# Altium PCB goodfet22a.PcbDoc
Units mil, origin at the board's own origin, x right, y up, seen from the top; angles counter-clockwise.
Board outline 2550 x 2200 mil, 2 copper layers (Top Layer, Bottom Layer); 36 components, 89 nets, 267 pads, 52 vias.
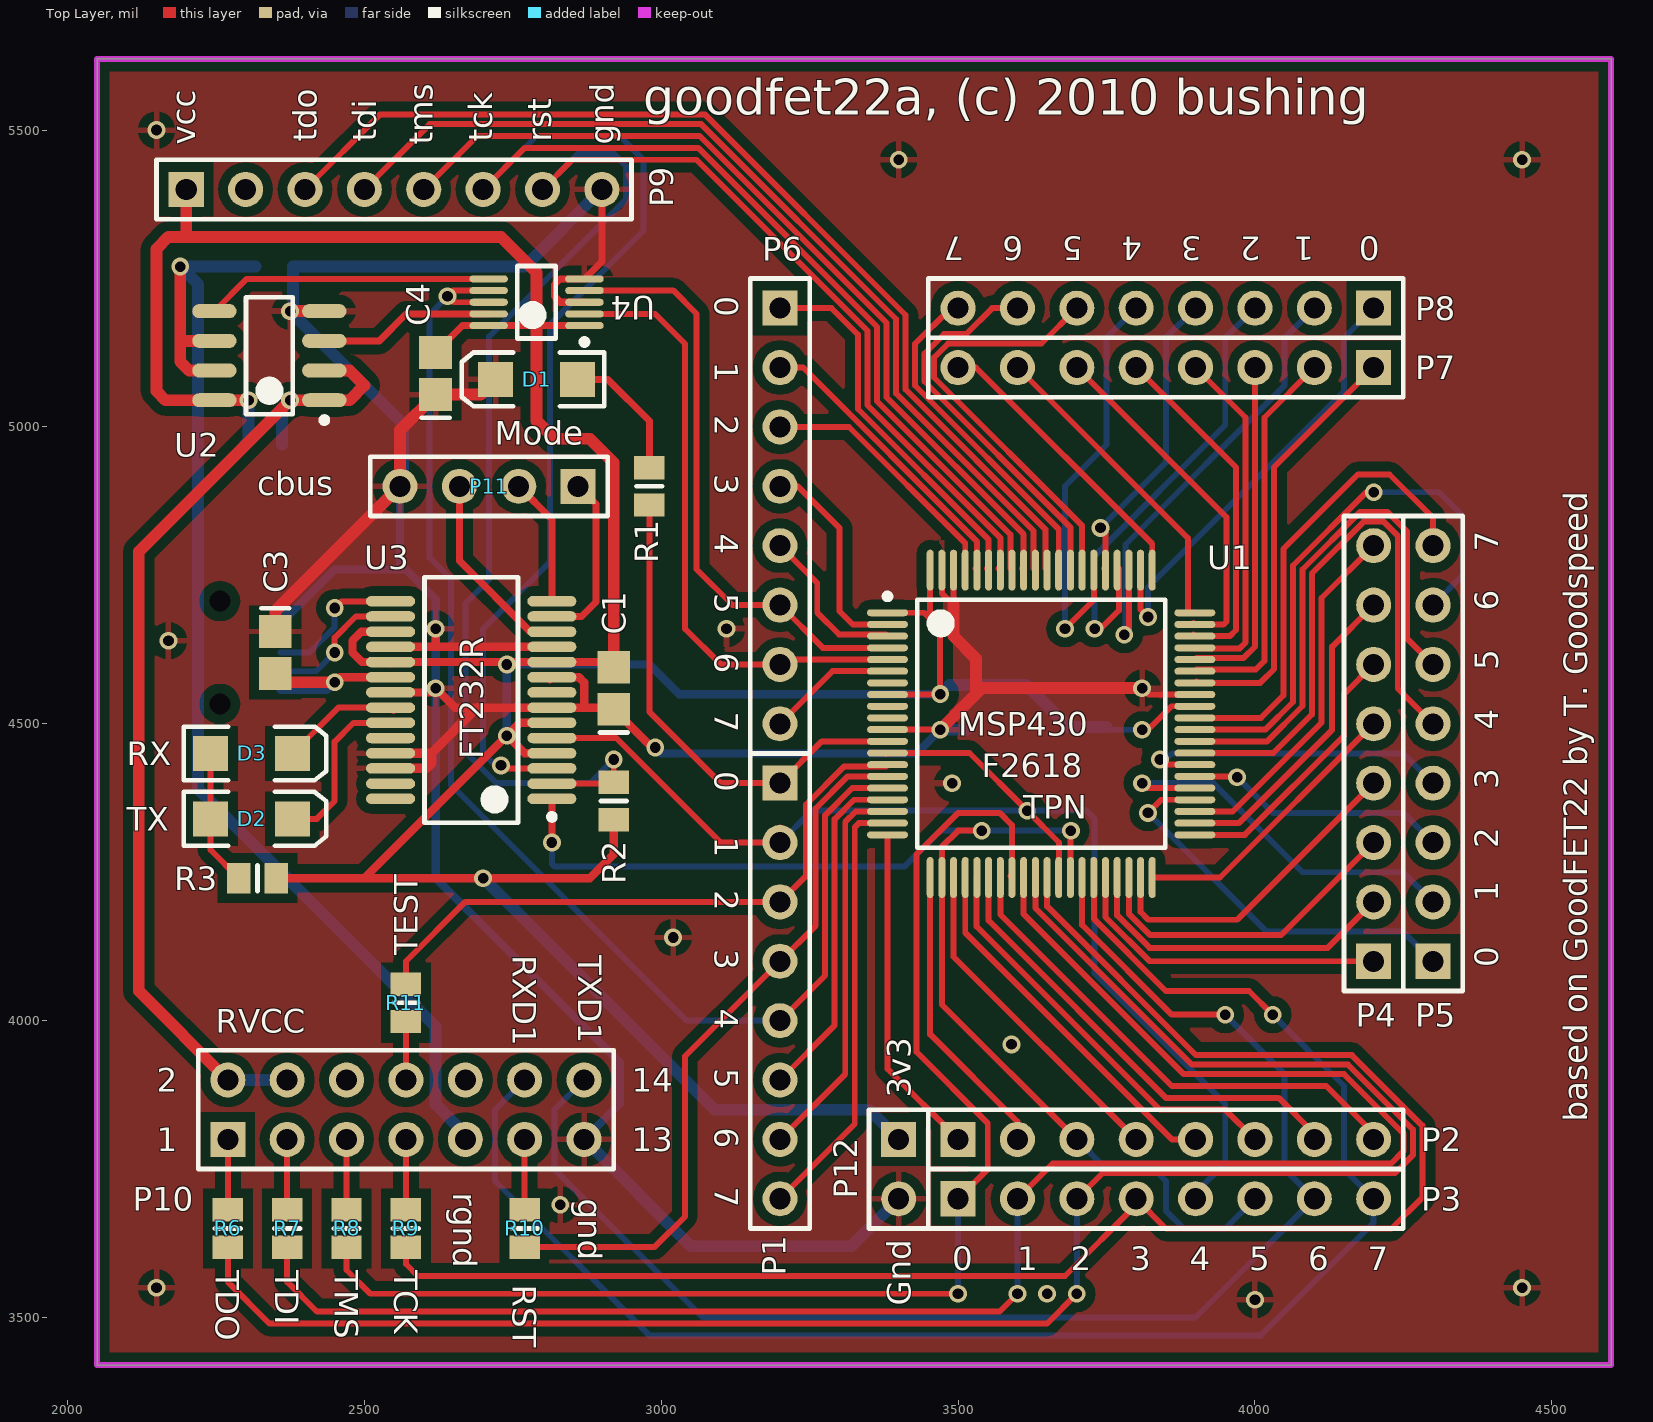
[diagram p0: Top Layer view]
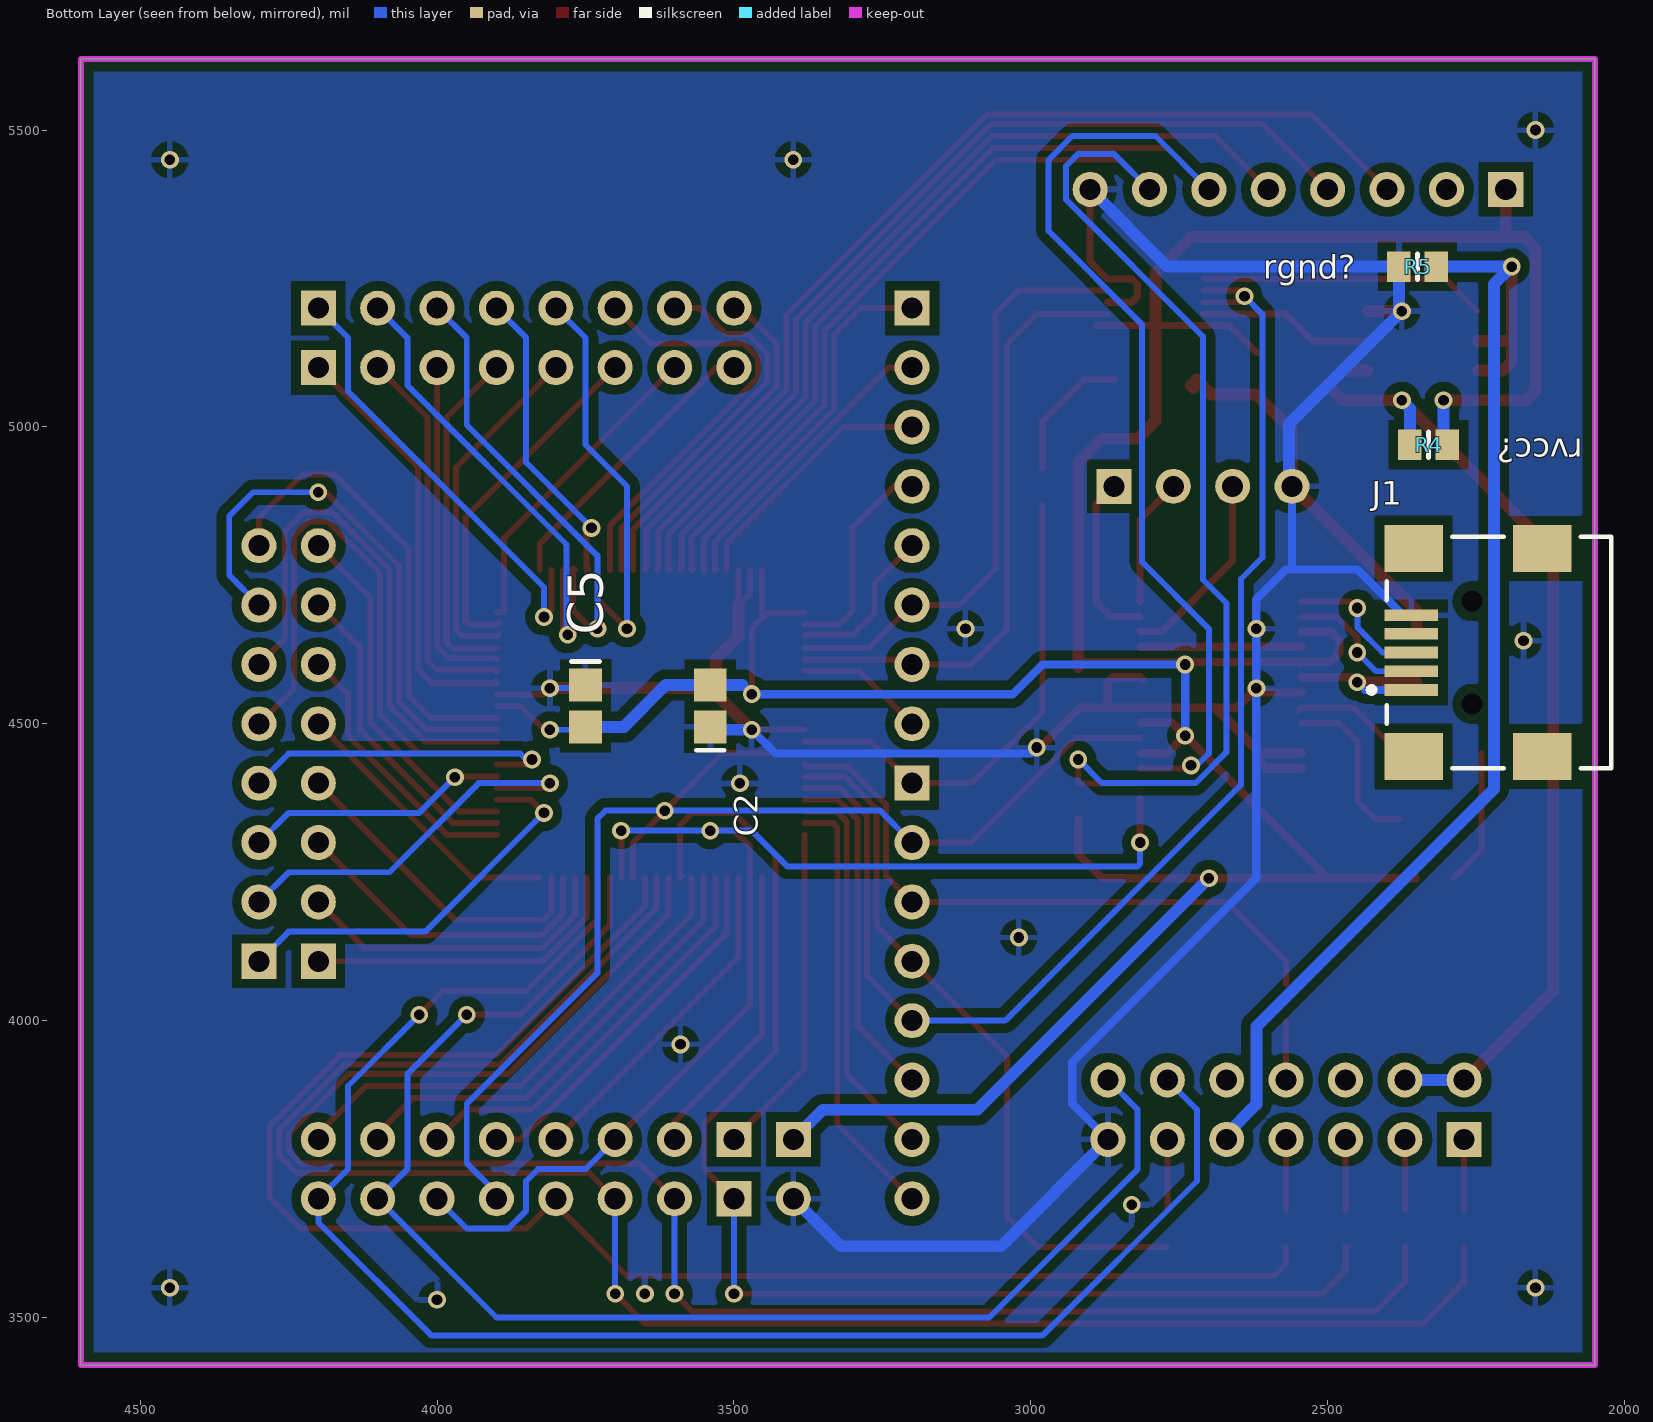
[diagram p1: Bottom Layer view, seen from below]

## Layer stack, top to bottom
Top Layer: signal copper 1.4
Dielectric: dielectric 12.6, FR-4, Dk 4.8
Bottom Layer: signal copper 1.4

## Board outline
2050,3420 4600,3420 4600,5620 2050,5620

## Design rules (kind name [scope] priority, off if disabled: settings)
Clearance Clearance_1 [InNamedPolygon('Bottom Layer-Gnd') Or  InNamedPolygon('Top Layer-Gnd')] p1: gap=16
Clearance [All] p2: gap=6
ComponentClearance [All] p1 off: gap=10 collisioncheckmode=3 verticalgap=10 showdistances=FALSE
DiffPairsRouting [All] p1: maxlimit=10 minlimit=10 mostfreqgap=10 maxuncoupledlength=500
MinimumSolderMaskSliver [All] p1: minsoldermaskwidth=5
PolygonConnect [All] p1: connectstyle=Relief reliefconductorwidth=10 reliefentries=4 polygonreliefangle="90 Angle"
RoutingVias [All] p1: holewidth=18 width=30 viastyle="Through Hole" minholewidth=18 minwidth=30 maxholewidth=28 maxwidth=50
SilkscreenOverComponentPads [All] p1: minsilkscreentomaskgap=6
SolderMaskExpansion [All] p1: expansion=4
Width Width_1 [(InNet('GND') OR InNet('RGND') OR InNet('RVCC') OR InNet('VCC') OR InNet('VCC5'))] p1: maxlimit=20 minlimit=10 preferedwidth=20
Width [All] p2: maxlimit=12 minlimit=6 preferedwidth=10
24 further rules are at their usual default settings.

## Classes and differential pairs
differential pair USBD: +USBD_P -USBD_N

## Components (designator, comment, footprint, x,y, rotation, side; value= is the part's Value field where it differs from the comment)
C1 "Cap Semi" CAPC2512L 2920,4560 r90 top
C2 "Cap Semi" CAPC2512L 3540,4530 r90 bottom
C3 "Cap Semi" CAPC2512L 2350,4620 r270 top
C4 "Cap Semi" CAPC2512L 2620,5090 r90 top
C5 "Cap Semi" CAPC2512L 3750,4530 r270 bottom
D1 "Mode" DSO-F2/D6.1 2790,5080 r180 top
D2 "TXLED" DSO-F2/D6.1 2310,4340 r0 top
D3 "RXLED" DSO-F2/D6.1 2310,4450 r0 top
J1 "USB-Btype" 440479 2050,4620 r180 bottom
P1 "Header 8" HDR1X8 3200,4400 r270 top
P2 "Header 8" HDR1X8 3500,3800 r0 top
P3 "Header 8" HDR1X8 3500,3700 r0 top
P4 "Header 8" HDR1X8 4200,4100 r90 top
P5 "Header 8" HDR1X8 4300,4100 r90 top
P6 "Header 8" HDR1X8 3200,5200 r270 top
P7 "Header 8" HDR1X8 4200,5100 r180 top
P8 "Header 8" HDR1X8 4200,5200 r180 top
P9 "Header 8" HDR1X8 2200,5400 r0 top
P10 "Header 7X2" HDR2X7 2270,3800 r0 top
P11 "Header 4" HDR1X4 2860,4900 r180 top
P12 "Header 2" HDR1X2 3400,3800 r270 top
R1 "Res Semi" RESC2012L 2980,4900 r90 top
R2 "Res Semi" RESC2012L 2920,4370 r270 top
R3 "Res Semi" RESC2012L 2320,4240 r0 top
R4 "Res Semi" RESC2012L 2330,4970 r180 bottom
R5 "Res Semi" RESC2012L 2348.5,5270 r180 bottom
R6 "Res Semi" RESC2012L 2270,3650 r270 top
R7 "Res Semi" RESC2012L 2370,3650 r270 top
R8 "Res Semi" RESC2012L 2470,3650 r270 top
R9 "Res Semi" RESC2012L 2570,3650 r270 top
R10 "Res Semi" RESC2012L 2770,3650 r270 top
R11 "Res Semi" RESC2012L 2570,4030 r270 top
U1 "MSP430F2618TPN" TSQFP50P1400X1400X160-80N 3640,4500 r0 top
U2 "TL072D" D008_L 2340,5120 r180 top
U3 "FT232RL" SOP65P780X200-28N 2680,4540 r180 top
U4 "TS5A23157" TSSOP50P490X110-10N 2790,5210 r180 top

## Footprints (in the part's own frame and the unit in brackets; to place one, negate y for a bottom-side part, rotate by r counter-clockwise, add the part's x,y. Pads: shape width x height; smd on the part's side, far side on the other; paste and mask are expansions set on the pad)
440479 [mm] "Connector; USB2.0, Type AB, SM; 5 Position; Right Angle"
  rect 2.3x0.5 smd: 1(-7.85,-1.6) 2(-7.85,-0.8) 3(-7.85,0) 4(-7.85,0.8) 5(-7.85,1.6)
  rect 2.5x2 smd: 6(-7.75,4.45) 7(-2.25,4.45) 8(-7.75,-4.45) 9(-2.25,-4.45)
  round 0.6 hole 0.9 unplated: MH1(-5.25,2.2) MH2(-5.25,-2.2)
  silkscreen extent -9.68,-4.95 0.7,4.95
CAPC2512L [mm] "Chip Capacitor, Body 2.54x1.27mm, IPC High Density"
  rect 1.4x1.4 smd: 1(-0.9,0) 2(0.9,0)
  silkscreen extent -1.9,-0.6 -1.9,0.6, body extent -1.45,-0.82 1.45,0.82, height 1.3
D008_L [mm] "SOIC, 8-Leads, Body 4.9x3.9mm, Pitch 1.27mm, IPC High Density"
  oval 1.9x0.6 smd: 1(-2.35,1.905) 2(-2.35,0.635) 3(-2.35,-0.635) 4(-2.35,-1.905) 5(2.35,-1.905) 6(2.35,-0.635) 7(2.35,0.635) 8(2.35,1.905)
  silkscreen extent -2.48,-2.5 1,2.88, body extent -2,-2.5 2,2.5, height 1.75
DSO-F2/D6.1 [mm] "SMT LED; 2 Flat Leads"
  rect 1.5x1.5 smd: 1(-1.75,0) 2(1.75,0)
  silkscreen extent -2.9,-1.15 3.2,1.15
HDR1X2 [mm] "Connector; Header; 2 Position"
  rect 1.5x1.5 hole 0.9: 1(0,0)
  round 1.5 hole 0.9: 2(2.54,0)
  silkscreen extent -1.27,-1.27 3.81,1.27
HDR1X4 [mm] "Connector; Header; 4 Position"
  rect 1.5x1.5 hole 0.9: 1(0,0)
  round 1.5 hole 0.9: 2(2.54,0) 3(5.08,0) 4(7.62,0)
  silkscreen extent -1.27,-1.27 8.89,1.27
HDR1X8 [mm] "Connector; Header; 8 Position"
  rect 1.5x1.5 hole 0.9: 1(0,0)
  round 1.5 hole 0.9: 2(2.54,0) 3(5.08,0) 4(7.62,0) 5(10.16,0) 6(12.7,0) 7(15.24,0) 8(17.78,0)
  silkscreen extent -1.27,-1.27 19.05,1.27
HDR2X7 [mm] "Connector; Header; 7x2 Position"
  rect 1.5x1.5 hole 0.9: 1(0,0)
  round 1.5 hole 0.9: 2(0,2.54) 3(2.54,0) 4(2.54,2.54) 5(5.08,0) 6(5.08,2.54) 7(7.62,0) 8(7.62,2.54) 9(10.16,0) 10(10.16,2.54) 11(12.7,0) 12(12.7,2.54) 13(15.24,0) 14(15.24,2.54)
  silkscreen extent -1.27,-1.27 16.51,3.81
RESC2012L [mm] "Chip Resistor, Body 2.0x1.3mm, IPC High Density"
  rect 1x1.3 smd: 1(-0.8,0) 2(0.8,0)
  silkscreen extent 0,-0.55 0,0.55, body extent -1.07,-0.7 1.07,0.7, height 2.54
SOP65P780X200-28N [mm] "SOP, 28-Leads, Body 10.5x5.6mm (max), Pitch 0.65mm, IPC Medium Density"
  oval 2.1x0.45 smd: 1(-3.45,4.225) 2(-3.45,3.575) 3(-3.45,2.925) 4(-3.45,2.275) 5(-3.45,1.625) 6(-3.45,0.975) 7(-3.45,0.325) 8(-3.45,-0.325) 9(-3.45,-0.975) 10(-3.45,-1.625) 11(-3.45,-2.275) 12(-3.45,-2.925) 13(-3.45,-3.575) 14(-3.45,-4.225) 15(3.45,-4.225) 16(3.45,-3.575) 17(3.45,-2.925) 18(3.45,-2.275) 19(3.45,-1.625) 20(3.45,-0.975) 21(3.45,-0.325) 22(3.45,0.325) 23(3.45,0.975) 24(3.45,1.625) 25(3.45,2.275) 26(3.45,2.925) 27(3.45,3.575) 28(3.45,4.225)
  silkscreen extent -3.58,-5.25 2,5.25, body extent -2.8,-5.25 2.8,5.25, height 2
TSQFP50P1400X1400X160-80N [mm] "TSQFP, 80-Leads, Body 14.2x14.2mm (max), Pitch 0.50mm, IPC Medium Density"
  oval 1.75x0.3 smd: 1(-6.575,4.75) 2(-6.575,4.25) 3(-6.575,3.75) 4(-6.575,3.25) 5(-6.575,2.75) 6(-6.575,2.25) 7(-6.575,1.75) 8(-6.575,1.25) 9(-6.575,0.75) 10(-6.575,0.25) 11(-6.575,-0.25) 12(-6.575,-0.75) 13(-6.575,-1.25) 14(-6.575,-1.75) 15(-6.575,-2.25) 16(-6.575,-2.75) 17(-6.575,-3.25) 18(-6.575,-3.75) 19(-6.575,-4.25) 20(-6.575,-4.75) 41(6.575,-4.75) 42(6.575,-4.25) 43(6.575,-3.75) 44(6.575,-3.25) 45(6.575,-2.75) 46(6.575,-2.25) 47(6.575,-1.75) 48(6.575,-1.25) 49(6.575,-0.75) 50(6.575,-0.25) 51(6.575,0.25) 52(6.575,0.75) 53(6.575,1.25) 54(6.575,1.75) 55(6.575,2.25) 56(6.575,2.75) 57(6.575,3.25) 58(6.575,3.75) 59(6.575,4.25) 60(6.575,4.75)
  oval 0.3x1.75 smd: 21(-4.75,-6.575) 22(-4.25,-6.575) 23(-3.75,-6.575) 24(-3.25,-6.575) 25(-2.75,-6.575) 26(-2.25,-6.575) 27(-1.75,-6.575) 28(-1.25,-6.575) 29(-0.75,-6.575) 30(-0.25,-6.575) 31(0.25,-6.575) 32(0.75,-6.575) 33(1.25,-6.575) 34(1.75,-6.575) 35(2.25,-6.575) 36(2.75,-6.575) 37(3.25,-6.575) 38(3.75,-6.575) 39(4.25,-6.575) 40(4.75,-6.575) 61(4.75,6.575) 62(4.25,6.575) 63(3.75,6.575) 64(3.25,6.575) 65(2.75,6.575) 66(2.25,6.575) 67(1.75,6.575) 68(1.25,6.575) 69(0.75,6.575) 70(0.25,6.575) 71(-0.25,6.575) 72(-0.75,6.575) 73(-1.25,6.575) 74(-1.75,6.575) 75(-2.25,6.575) 76(-2.75,6.575) 77(-3.25,6.575) 78(-3.75,6.575) 79(-4.25,6.575) 80(-4.75,6.575)
  silkscreen extent -6.7,-5.3 5.3,5.57, body extent -6,-6 6,6, height 1.6
TSSOP50P490X110-10N [mm] "TSSOP, 10-Leads, Body 3.1x3.1mm (max), Pitch 0.50mm, IPC Medium Density"
  oval 1.65x0.3 smd: 1(-2.05,1) 2(-2.05,0.5) 3(-2.05,0) 4(-2.05,-0.5) 5(-2.05,-1) 6(2.05,-1) 7(2.05,-0.5) 8(2.05,0) 9(2.05,0.5) 10(2.05,1)
  silkscreen extent -2.18,-1.55 0.82,1.82, body extent -1.55,-1.55 1.55,1.55, height 1.1

## Part data
C1 C2 C3 C4 C5: "Capacitor (Semiconductor SIM Model)"
D1 D2 D3: library part LED2, "Typical RED, GREEN, YELLOW, AMBER GaAs LED"
J1: "USB B Type Right Angle, SMT 5 Pin"
P1 P2 P3 P4 P5 P6 P7 P8 P9: "Header, 8-Pin"
P10: "Header, 7-Pin, Dual row"
P11: "Header, 4-Pin"
P12: "Header, 2-Pin"
R1 R2 R3 R4 R5 R6 R7 R8 R9 R10 R11: "Semiconductor Resistor"
U2: "Low-Noise JFET-Input Operational Amplifier"
U3: "USB UART Asynchronous Serial Data Transfer Chip, LQFP-32, Pb-Free"

## Via types
v1: diameter 30, hole 18, Top Layer to Bottom Layer, 52 vias

## Nets (pads, with @x,y where several pads share a name; then routed paths per layer and width w, separated by ;. In a path a pad name is that pad's centre, name@x,y a point inside that pad or via, vN(x,y) a via of type N, cw(c..) or ccw(c..) an arc to the next point about the centre after c; other vN are vias at no path point)
DAC0: P6.7 U1.5 U4.2 | length 1036.1
  Top Layer w10: U4.2 2989.69,5190.31 3040,5140 3040,4660 3100,4600 P6.7 ; P6.7@3200,4608.27 U1.5
DAC1: P6.6 U1.4 U4.4 | length 1011.8
  Top Layer w10: U4.4 3019.68,5229.69 3020,5230 3059.47,5190.53 3059.47,4760.53 3120,4700 P6.6 3272.05,4627.95 U1.4
DTR: P9.7 R2.1 U1.74 U3.2 | length 2891
  Top Layer w10: P9.7 2850,5450 3059.49,5450 3347.47,5162.02 3347.47,5036.76 3571.1,4813.13 U1.74 U1.74@3568.32,4761.64 ; U3.2 R2.1@2920,4399.25 ; R2.1 v1(2920,4440)
  Bottom Layer w10: P9.7 2860,5460 2920,5460 2940.53,5439.47 2940.53,5382.69 2710,5152.16 2710,4742.63 2670,4702.63 2670,4452.63 2722.63,4400 2880,4400 v1(2920,4440)
GND: C1.1 C2.1 C3.1 C4.1 C5.1 D1.2 J1.5 P9.8 P10.13 P11.4 P12.2 R5.1 U1.11 U1.53 U1.78 U1.79 U2.4 U3.7 U3.9 U3.11 U3.18 U3.21 U3.25 U3.26 U4.3 U4.5 | length 6794.4
  Top Layer w10: U1.11 3470,4490.16 v1@3470.16,4490.16 ; U1.79 3472.68,4719.69 3492.36,4700 U1.78 ; v1(3810,4560) 3820.79,4549.21 U1.53 U1.53@3866.09,4549.21
  Top Layer w12: U4.3 2830,5210 2820,5220 2820,5240 2829.37,5249.37 U4.5 2900,5278.66 P9.8
  Top Layer w14: U3.21 v1@2617.2,4552.8 ; U3.18 2620,4629.57 ; v1(2620,4560) 2652.8,4527.2 2690,4527.2 U3.7 2917.36,4527.2 C1.1 2984.57,4460 v1(2990,4460) ; v1(2620,4660) 2620,4629.57 ; U3.9@2812.09,4574.65 U3.9 2861.61,4578.39 2870.17,4569.83 2870.17,4535.39 2870,4535.23 ; U3.11 2620,4629.57
  Top Layer w16: U3.26 2604.84,4424.84 2613.23,4433.23 2613.23,4450.43 ; U3.25 2613.23,4450.43 ; 2690,4527.2 2613.23,4450.43
  Top Layer w20: C3.1 2350,4690 P11.4 2560,4994.57 C4.1 2695.67,5054.57 D1.2 ; v1(2375,5195) U2.4 ; D1.2@2725.55,5065.55 D1.2@2730,5070 ; v1@3470.16,4490.16 3530,4550 ; 3492.36,4700 3492.36,4647.64 3530,4610 3530,4550 ; v1(3810,4560) 3540,4560 3530,4550
  Bottom Layer w10: C5.1 3755.43,4560 v1(3810,4560)
  Bottom Layer w14: J1.5 2372.99,4682.99 2450,4760 2560,4760 ; P11.4@2565,4905 P11.4 2560,4760 ; P10.13 2930,3860 2930,3930 2620,4240 v1(2620,4560) v1(2620,4660) 2620,4710 2570,4760 2560,4760 ; v1(2990,4460) 3000,4450 3430,4450 v1(3470,4490)
  Bottom Layer w20: P11.4@2565,4905 2565,5005 v1(2375,5195) 2380,5200 R5.1 2770,5270 P9.8 ; P10.13 3050,3620 3320,3620 P12.2 ; v1(3470,4490) C2.1@3514.57,4490
  other v1: 4000,3530 3650,3540 2150,3550 4450,3550 2830,3690 3590,3960 3020,4140 3490,4400 2170,4640 3110,4660 3400,5450 4450,5450 2150,5500
GSEL: P1.5 U1.16 U4.7 U4.8 | length 2216.9
  Top Layer w10: U4.8 2650,5210 v1(2640,5220) 2649.68,5229.69 U4.7 ; P1.5 3276,4076 3276,4346 3321.73,4391.73 U1.16
  Bottom Layer w10: v1(2640,5220) 2610,5190 2610,4780 2646,4744 2646,4397.23 3043.23,4000 P1.5
MODE: P1.1 R1.1 U1.12 | length 828.5
  Top Layer w10: R1.1 2980,4520 3100,4400 P1.1 3270.47,4470.47 U1.12
NetD1_1: D1.1 R1.2 | length 228.6
  Top Layer w12: D1.1 2910,5080 2980,5010 R1.2
NetD2_1: D2.1 D3.1 R3.1 | length 229.6
  Top Layer w10: D3.1 D2.1 2241.1,4287.4 R3.1
NetD2_2: D2.2 U3.23 | length 290.8
  Top Layer w10: D2.2 2420,4340 2450,4370 2450,4470 2481.61,4501.61 U3.23
NetD3_2: D3.2 U3.22 | length 203.9
  Top Layer w10: D3.2 2456.1,4527.2 U3.22
  Top Layer w12: U3.22 U3.22@2548.91,4522.47
NetP1_6: P1.6 U1.17 | length 580.2
  Top Layer w10: P1.6 3292,3992 3292,4339.37 3324.67,4372.05 U1.17
NetP1_7: P1.7 U1.18 | length 658.7
  Top Layer w10: P1.7 3310,3910 3310,4334.75 3327.62,4352.36 U1.18
NetP1_8: P1.8 U1.19 | length 736.1
  Top Layer w10: P1.8 3326,3826 3326,4326 3332.68,4332.68 U1.19
NetP2_1: P2.1 U1.20 | length 562.2
  Top Layer w10: U1.20 3381.14,3918.86 P2.1
NetP2_2: P2.2 U1.21 | length 502
  Top Layer w10: U1.21 3452.99,3977.01 3600,3830 P2.2
NetP2_4: P2.4 U1.23 | length 568.6
  Top Layer w10: U1.23 3492.36,4107.64 P2.4
NetP2_5: P2.5 U1.24 | length 625.3
  Top Layer w10: U1.24 3512.05,4147.95 3860,3800 P2.5
NetP2_6: P2.6 U1.25 | length 699.9
  Top Layer w10: U1.25 3531.31,4240.72 3531.31,4158.69 3840,3850 3950,3850 P2.6
NetP2_7: P2.7 U1.26 | length 779.7
  Top Layer w10: U1.26 3551.42,4168.58 3850,3870 4040,3870 4100,3810 P2.7
NetP2_8: P2.8 U1.27 | length 853.9
  Top Layer w10: U1.27 3571.1,4178.9 3860,3890 4120,3890 4200,3810 P2.8
NetP4_1: P4.1 U1.36 | length 549.3
  Top Layer w10: U1.36 3748.27,4174.36 3822.63,4100 P4.1
NetP4_2: P4.2 U1.37 | length 550.6
  Top Layer w10: U1.37 3767.95,4177.3 3822.63,4122.63 4122.63,4122.63 P4.2
NetP4_3: P4.3 U1.38 | length 552.9
  Top Layer w10: U1.38 3787.64,4180.24 3823.94,4143.94 4043.94,4143.94 P4.3
NetP4_4: P4.4 U1.39 | length 551.4
  Top Layer w10: U1.39 3807.32,4183.19 3820.51,4170 3970,4170 P4.4
NetP4_5: P4.5 U1.40 | length 480.2
  Top Layer w10: U1.40 3941.14,4241.14 P4.5
NetP4_6: P4.6 U1.41 | length 461
  Top Layer w10: U1.41 3982.99,4312.99 4150,4480 4150,4550 P4.6
NetP4_7: P4.7 U1.42 | length 535.3
  Top Layer w10: U1.42 3972.68,4332.68 4130,4490 4130,4630 P4.7
NetP4_8: P4.8 U1.43 | length 609.6
  Top Layer w10: U1.43 3962.36,4352.36 4112,4502 4112,4712 P4.8
NetP5_1: P5.1 U1.44 | length 671.5
  Top Layer w10: v1(3820,4350) 3842.05,4372.05 U1.44
  Bottom Layer w10: v1(3820,4350) 4020,4150 4250,4150 P5.1
NetP5_2: P5.2 U1.45 | length 665.1
  Top Layer w10: v1(3810,4400) 3818.27,4391.73 U1.45
  Bottom Layer w10: v1(3810,4400) 3930,4400 4080,4250 4250,4250 P5.2
NetP5_3: P5.3 U1.46 | length 449.3
  Top Layer w10: U1.46@3900.28,4410 U1.46 3968.58,4411.42 v1(3970,4410)
  Bottom Layer w10: v1(3970,4410) 4030,4350 4250,4350 P5.3
NetP5_4: P5.4 U1.47 | length 546.8
  Top Layer w10: v1@3841.1,4431.1 U1.47
  Bottom Layer w10: v1@3840,4430 3845,4435 3860,4450 4250,4450 P5.4
  other v1: 3840,4440
NetP5_5: P5.5 U1.48 | length 993.4
  Top Layer w10: U1.48 4030.79,4450.79 4096,4516 4096,4753.31 4183.21,4840.53 4216.79,4840.53 4240.53,4816.79 4240.53,4559.47 P5.5
NetP5_6: P5.6 U1.49 | length 907.4
  Top Layer w10: U1.49 4020.47,4470.47 4080,4530 4080,4759.94 4176.59,4856.53 4223.41,4856.53 4256.53,4823.41 4256.53,4643.47 P5.6
NetP5_7: P5.7 U1.50 | length 933.2
  Top Layer w10: U1.50 4017.53,4490.16 4064,4536.63 4064,4766.57 v1@4187.43,4890
  Bottom Layer w10: v1@4200,4880 v1@4205,4885 ; v1(4200,4890) 4310,4890 4350,4850 4350,4750 P5.7
NetP5_8: P5.8 U1.51 | length 792.7
  Top Layer w10: U1.51 4009.84,4509.84 4048,4548 4048,4794.77 4173.23,4920 4226.77,4920 4300,4846.77 P5.8
NetP6_1: P6.1 U1.75 | length 641.5
  Top Layer w10: P6.1 3286.86,5200 3331.47,5155.39 3331.47,5030.14 3551.42,4810.19 U1.75 U1.75@3548.64,4761.64
NetP6_2: P6.2 U1.76 | length 505.3
  Top Layer w10: P6.2 3238.98,5100 3531.73,4807.25 U1.76 U1.76@3528.95,4761.64
NetP6_3: P6.3 U1.77 | length 438.6
  Top Layer w10: P6.3 3316.35,5000 3512.05,4804.31 U1.77
NetP6_4: P6.4 U1.2 | length 359.5
  Top Layer w10: P6.4 3230,4900 3300,4830 3300,4690 3322.68,4667.32 U1.2
NetP6_5: P6.5 U1.3 | length 273.5
  Top Layer w10: P6.5 3262.82,4737.18 3262.82,4687.18 3299.58,4650.42 3378.36,4650.42 U1.3
NetP6_8: P6.8 U1.6 | length 217.8
  Top Layer w10: P6.8 3288.58,4588.58 U1.6
NetP7_1: P7.1 U1.54 | length 724.2
  Top Layer w10: U1.54@3901.64,4571.68 U1.54 4008.9,4568.9 4032,4592 4032,4932 P7.1
NetP7_2: P7.2 U1.55 | length 654.4
  Top Layer w10: U1.55@3899.76,4587.68 U1.55 3901.64,4591.36 4001.36,4591.36 4016,4606 4016,5016 P7.2
NetP7_3: P7.3 U1.56 | length 580.1
  Top Layer w10: U1.56 3901.64,4611.05 3981.05,4611.05 4000,4630 P7.3
NetP7_4: P7.4 U1.57 | length 587.7
  Top Layer w10: U1.57 3899.76,4627.05 3974.42,4627.05 3984,4636.63 3984,5016 P7.4
NetP7_5: P7.5 U1.58 | length 588.7
  Top Layer w10: P7.5 3968,4932 3968,4658 3957.64,4647.64 U1.58 U1.58@3896.23,4650.27
NetP7_6: P7.6 U1.59 | length 591.2
  Top Layer w10: P7.6 3952,4848 3952,4672 3947.32,4667.32 U1.59 U1.59@3896.23,4669.95
NetP7_7: P7.7 U1.60 | length 543.2
  Top Layer w10: P7.7 3887.02,4812.98 3887.02,4687.91 3897.95,4687.91 U1.60
NetP7_8: P7.8 U1.61 | length 494.2
  Top Layer w10: P7.8 3530,5100 3827.01,4802.99 U1.61
NetP8_1: P8.1 U1.62 | length 761.5
  Top Layer w10: U1.62 3807.32,4692.68 v1(3820,4680)
  Bottom Layer w10: v1(3820,4680) 3820,4730 4150,5060 4150,5150 P8.1
NetP8_2: P8.2 U1.63 | length 794.6
  Top Layer w10: v1(3780,4650) 3787.64,4657.64 U1.63
  Bottom Layer w10: v1(3780,4650) 3782,4652 3782,4802 4050,5070 4050,5150 P8.2
NetP8_3: P8.3 U1.64 | length 774.3
  Top Layer w10: v1@3740,4660 3770.73,4690.73 3770.73,4758.86 3770.73,4761.64 U1.64
  Bottom Layer w10: v1@3740,4660 3735,4665 3730,4670 3730,4783.23 3950,5003.23 3950,5150 P8.3
  other v1: 3730,4660
NetP8_4: P8.4 U1.65 | length 514.8
  Top Layer w10: v1(3740,4830) 3748.27,4821.73 U1.65 U1.65@3745.49,4761.64
  Bottom Layer w10: v1(3740,4830) 3850,4940 3850,5150 P8.4
NetP8_5: P8.5 U1.66 | length 708.7
  Top Layer w10: v1(3680,4660) 3728.58,4708.58 U1.66
  Bottom Layer w10: v1(3680,4660) 3680,4900 3750,4970 3750,5150 P8.5
NetP8_6: P8.6 U1.67 | length 736.2
  Top Layer w10: P8.6 3640.53,5140.53 3483.21,5140.53 3459.47,5116.79 3459.47,5083.21 3708.9,4833.79 U1.67
NetP8_7: P8.7 U1.68 | length 654.6
  Top Layer w10: P8.7 3557.31,5200 3513.84,5156.53 3476.59,5156.53 3443.47,5123.41 3443.47,5076.53 3689.21,4830.79 U1.68
NetP8_8: P8.8 U1.69 | length 578.8
  Top Layer w10: P8.8 3487.37,5200 3427.47,5140.1 3427.47,5069.9 3669.53,4827.85 U1.69
NetP9_3: P9.3 U1.70 | length 1731.9
  Top Layer w10: P9.3 2526,5526 3074,5526 3411.47,5188.53 3411.47,5063.27 3647.06,4827.68 3647.06,4761.64 U1.70
NetP9_4: P9.4 U1.71 | length 1597.2
  Top Layer w10: P9.4 2610,5510 3067.37,5510 3395.47,5181.9 3395.47,5056.65 3627.38,4824.74 3627.38,4761.64 U1.71
NetP9_5: P9.5 U1.72 | length 1463.1
  Top Layer w10: P9.5 2690,5490 3064.75,5490 3379.47,5175.27 3379.47,5050.02 3610.47,4819.02 U1.72 U1.72@3607.69,4761.64
NetP10_1: P10.1 R6.1 | length 108.5
  Top Layer w10: R6.1 P10.1@2270,3790
NetP10_3: P10.3 R7.1 | length 108.5
  Top Layer w10: R7.1 P10.3@2370,3790
NetP10_5: P10.5 R8.1 | length 108.5
  Top Layer w10: R8.1 P10.5@2470,3790
NetP10_7: P10.7 R9.1 | length 108.5
  Top Layer w10: R9.1 P10.7@2570,3790
NetP10_8: P10.8 R11.2 | length 108.5
  Top Layer w10: P10.8@2570,3890 P10.8 R11.2
NetP10_11: P10.11 R10.1 | length 108.5
  Top Layer w10: R10.1 P10.11@2770,3790
NetP11_1: P11.1 U3.13 | length 291.6
  Top Layer w12: U3.13 2865.75,4680.75 2890,4705 2890,4870 P11.1
NetP11_2: P11.2 U3.14 | length 216.8
  Top Layer w12: P11.2 2815.83,4844.17 U3.14
NetP11_3: P11.3 U3.12 | length 330.7
  Top Layer w12: P11.3 2660,4774.6 2779.44,4655.16 U3.12
NetU2_3: U2.3 U4.9 | length 295.5
  Top Layer w12: U2.3 2525,5145 2570.31,5190.31 U4.9
NetU2_5: U2.5 U4.6 | length 484.3
  Top Layer w10: U2.5 2301.85,5249.37 U4.6
RGND: P10.9 R5.2 U2.6 U2.7 | length 2079.1
  Top Layer w20: v1(2190,5270) 2190,5150 ; U2.7 2205,5095 2190,5110 2190,5150 ; U2.6 2195,5145 2190,5150
  Bottom Layer w20: R5.2 v1(2190,5270) 2220,5240 2220,4390 2620,3990 2620,3858.94 2670,3808.94 P10.9
RTS: P9.6 U1.73 U3.3 | length 2902
  Top Layer w10: P9.6 2770,5470 3062.12,5470 3363.47,5168.65 3363.47,5043.39 3588.01,4818.86 3588.01,4761.64 U1.73 U1.73@3590,4758.07 ; v1@2724.84,4424.84 2730,4424.84 U3.3 U3.3@2816.24,4425.25
  Bottom Layer w10: P9.6 2790,5490 2930,5490 2970,5450 2970,5330 2812.39,5172.39 2812.39,4772.39 2700,4660 2700,4450 2720,4430 2725,4435 2730,4440 v1(2730,4430)
RVCC: P10.2 P10.4 R4.1 U2.1 U2.2 | length 1706.5
  Top Layer w20: P10.2 2120,4050 2120,4790 v1(2375,5045) U2.1 2475,5045 2500,5070 2475,5095 U2.2
  Bottom Layer w20: P10.2 P10.4 ; R4.1 2361.5,5031.5 v1(2375,5045)
RXD: P2.3 P3.6 U1.22 U1.33 U3.1 | length 2167.5
  Top Layer w10: v1(3540,4320) 3500,4320 3472.68,4292.68 U1.22 3472.68,4027.32 P2.3 ; U1.33 3689.21,4319.21 v1(3690,4320)
  Top Layer w12: v1(2815.83,4300) U3.1
  Bottom Layer w10: v1(2815.83,4300) 2815.83,4264.17 2820.53,4259.47 3409.47,4259.47 3470,4320 v1(3540,4320) v1(3690,4320) ; P2.3 3750,3750 3830,3750 3850,3730 3850,3680 3880,3650 3950,3650 P3.6
RXD1: P3.8 P10.12 U1.35 | length 2715.5
  Top Layer w10: U1.35 3728.58,4171.42 3850,4050 3990,4050 v1(4030,4010)
  Bottom Layer w10: P10.12 2720,3850 2720,3730 2980,3470 4010,3470 4200,3660 P3.8 4150,3750 4150,3890 v1(4030,4010)
TARGET_RST: P1.4 R10.2 U1.15 | length 1213.4
  Top Layer w10: R10.2 2988.5,3618.5 3040,3670 3040,3940 P1.4 3260,4160 3260,4357.37 3314.04,4411.42 U1.15
TARGET_TCK: P3.4 R9.2 U1.31 | length 2805.6
  Top Layer w10: R9.2 2570,3590 2590,3570 3680,3570 3800,3690 P3.4 3850,3650 4230,3650 4282,3702 4282,3823.25 4163.25,3942 3900.63,3942 3650,4192.63 3650,4240.98 U1.31
TARGET_TDI: P3.2 R7.2 U1.29 | length 3067.9
  Top Layer w10: R7.2@2370,3600 R7.2 2370,3560 2420,3510 3570,3510 v1(3600,3540) ; P3.2 3659.47,3759.47 4229.47,3759.47 4250,3780 4250,3810 4150,3910 3880,3910 3610,4180 3610.47,4180.47 U1.29
  Bottom Layer w10: v1(3600,3540) P3.2
TARGET_TDO: P3.3 R6.2 U1.30 | length 3179.6
  Top Layer w10: R6.2 2270,3560 2340,3490 3650,3490 v1(3700,3540) ; U1.30 3630.16,4189.84 3894,3926 4156.63,3926 4266,3816.63 4266,3773.37 4236.1,3743.47 3743.47,3743.47 P3.3
  Bottom Layer w10: v1(3700,3540) P3.3
TARGET_TMS: P3.1 R8.2 U1.28 | length 2185.9
  Top Layer w10: R8.2 2470,3580 2510,3540 v1(3500,3540) ; P3.1 3550,3750 3550,3827.37 3430,3947.37 3430,4280 3500,4350 3570,4350 3590.79,4329.21 U1.28 U1.28@3588.01,4243.92
  Bottom Layer w10: v1(3500,3540) P3.1
TEST: P1.3 R11.1 U1.14 | length 1057.1
  Top Layer w10: R11.1 2570,4100 2670,4200 P1.3 3244,4244 3244,4364 3308.32,4428.32 3378.36,4428.32 U1.14
TXD: P1.2 P3.5 U1.13 U1.32 U3.5 | length 2206.6
  Top Layer w10: U3.5 2923.98,4476.02 3100,4300 P1.2 P1.2@3200,4325.39 ; U1.13@3379.04,4448.69 U1.13 ; U1.13@3381.93,4450 U1.13 ; U1.32 3670,4241.61 3670,4300 v1(3616.39,4353.61) 3519.21,4450.79 U1.13
  Bottom Layer w10: P1.2 3253.61,4353.61 v1(3616.39,4353.61) 3716.39,4353.61 3730,4340 3730,4080 3950,3860 3950,3760 3900,3710 P3.5
TXD1: P3.7 P10.14 U1.34 | length 2393
  Top Layer w10: U1.34 3708.9,4161.1 3860,4010 v1(3950,4010)
  Bottom Layer w10: P10.14 2820,3850 2820,3750 3070,3500 3900,3500 P3.7 4050,3750 4050,3910 v1(3950,4010)
USBD_N: J1.2 U3.16 | length 238
  Top Layer w10: v1(2450,4620) 2450,4645 2485.75,4680.75 U3.16
  Bottom Layer w10: J1.2 2418.5,4588.5 v1(2450,4620)
USBD_P: J1.3 U3.15 | length 240
  Top Layer w10: v1(2450,4695) 2461.34,4706.34 U3.15
  Bottom Layer w10: J1.3 2407.57,4620 2450,4662.43 v1(2450,4695)
VCC: C1.2 C2.2 C4.2 C5.2 P9.1 P12.1 R2.2 R3.2 R4.2 U1.1 U1.8 U1.52 U1.80 U2.8 U3.4 U3.6 U3.10 U3.17 U3.19 U4.1 U4.10 | length 6588.4
  Top Layer w10: U1.8 v1@3469.21,4549.21 ; U1.1 3442.99,4687.01 3452.99,4677.01 ; U1.80 3452.99,4677.01 ; v1@3469.21,4550 3469.21,4660.79 3452.99,4677.01 ; v1(3810,4490) 3820,4490 3859.53,4529.53 U1.52
  Top Layer w12: C4.2 2665.2,5170.63 U4.10 2790,5170.63 U4.1 U4.1@2889.37,5170.63
  Top Layer w14: R3.2 2500,4240 ; U3.17 2495.16,4655.16 2480,4640 2480,4620 2496.02,4603.98 U3.19 ; U3.19@2546.15,4602 U3.19 ; U3.4 2769.57,4450.43 v1(2740,4480) ; U3.6 2761.61,4501.61 v1(2740,4480) ; R2.2 2920,4280 2880,4240 v1(2700,4240) 2500,4240 ; C1.2 2911.46,4603.98 U3.10 2740,4603.98 U3.19 ; 2500,4240 v1(2740,4480)
  Top Layer w20: P9.1 2200,5320 ; v1(2305,5045) U2.8 2165,5045 2150,5060 2150,5300 2170,5320 2200,5320 ; C1.2 2920,4940 2880,4980 2820,4980 2790,5010 2790,5170.63 2790,5260 2730,5320 2200,5320
  Bottom Layer w10: v1(3470,4550) 3485.43,4565.43 ; C5.2 3754.57,4490 v1(3810,4490)
  Bottom Layer w14: v1(2740,4480) v1(2740,4600) 2980,4600 3030,4550 v1(3470,4550)
  Bottom Layer w20: R4.2 2305,4976.5 v1(2305,5045) ; v1(2700,4240) 3090,3850 3350,3850 P12.1 ; 3485.43,4565.43 C2.2 3614.57,4565.43 3685.43,4494.57 C5.2
VCC5: C3.2 J1.1 U3.20 | length 275.6
  Top Layer w14: v1(2450,4570) 2458.39,4578.39 U3.20
  Top Layer w20: C3.2@2350,4570 v1(2450,4570)
  Bottom Layer w14: J1.1 2437.01,4557.01
pads on no net: J1.4 J1.6 J1.7 J1.8 J1.9 J1.MH1 J1.MH2 P9.2 P10.6 P10.10 U1.7 U1.9 U1.10 U3.8 U3.24 U3.27 U3.28

## Polygon pours and split planes (outlines as drawn)
GND on Bottom Layer "Bottom Layer-Gnd" (solid, remove dead copper, pour order 1001): 2070,5600 4580,5600 4580,3440 2070,3440
GND on Top Layer "Top Layer-Gnd" (solid, remove dead copper, pour order 1000): 2070,5600 4580,5600 4580,3440 2070,3440

## Keep-outs
Keep-Out Layer:
  the board outline again, w10

## Silkscreen, mask and mechanical layers (free items; w line width, h text height)
Top Overlay:
  text "goodfet22a, (c) 2010 bushing" at 2970,5526 h60
  text "tdo" at 2420,5480 h40 r90
  text "tdi" at 2520,5480 h40 r90
  text "tck" at 2715,5480 h40 r90
  text "rst" at 2815,5480 h40 r90
  text "vcc" at 2215,5475 h40 r90
  text "tms" at 2615,5475 h40 r90
  text "gnd" at 2920,5475 h40 r90
  text "7" at 3510,5320 h40 r180
  text "6" at 3610,5320 h40 r180
  text "5" at 3710,5320 h40 r180
  text "4" at 3810,5320 h40 r180
  text "3" at 3910,5320 h40 r180
  text "2" at 4010,5320 h40 r180
  text "1" at 4100,5320 h40 r180
  text "0" at 4210,5320 h40 r180
  text "0" at 3090,5220 h40 r270
  text "1" at 3090,5110 h40 r270
  text "2" at 3090,5020 h40 r270
  text "Mode" at 2720,4970 h40
  text "3" at 3090,4920 h40 r270
  text "cbus" at 2320,4885 h40
  text "4" at 3090,4820 h40 r270
  text "7" at 4410,4790 h40 r90
  text "5" at 3090,4720 h40 r270
  text "6" at 4410,4690 h40 r90
  text "6" at 3090,4620 h40 r270
  text "5" at 4410,4590 h40 r90
  text "7" at 3090,4520 h40 r270
  text "4" at 4410,4490 h40 r90
  text "MSP430" at 3500,4480 h40
  text "FT232R" at 2700,4440 h40 r90
  text "RX" at 2100,4430 h40
  text "0" at 3090,4420 h40 r270
  text "F2618" at 3540,4410 h40
  text "3" at 4410,4390 h40 r90
  text "TPN" at 3610,4340 h40
  text "TX" at 2100,4320 h40
  text "1" at 3090,4310 h40 r270
  text "2" at 4410,4290 h40 r90
  text "2" at 3090,4220 h40 r270
  text "1" at 4410,4200 h40 r90
  text "3" at 3090,4120 h40 r270
  text "TEST" at 2590,4110 h40 r90
  text "RXD1" at 2750,4110 h40 r270
  text "TXD1" at 2860,4110 h40 r270
  text "0" at 4410,4090 h40 r90
  text "4" at 3090,4020 h40 r270
  text "RVCC" at 2250,3980 h40
  text "5" at 3090,3920 h40 r270
  text "3v3" at 3420,3870 h40 r90
  text "based on GoodFET22 by T. Goodspeed" at 4560,3830 h40 r90
  text "6" at 3090,3820 h40 r270
  text "7" at 3090,3720 h40 r270
  text "rgnd" at 2650,3710 h40 r270
  text "gnd" at 2860,3700 h40 r270
  text "TDO" at 2250,3580 h40 r270
  text "TDI" at 2350,3580 h40 r270
  text "TMS" at 2450,3580 h40 r270
  text "TCK" at 2550,3580 h40 r270
  text "0" at 3490,3580 h40
  text "1" at 3600,3580 h40
  text "2" at 3690,3580 h40
  text "3" at 3790,3580 h40
  text "4" at 3890,3580 h40
  text "5" at 3990,3580 h40
  text "6" at 4090,3580 h40
  text "7" at 4190,3580 h40
  text "RST" at 2750,3555 h40 r270
  text "Gnd" at 3420,3520 h40 r90
Bottom Overlay:
  text "rgnd?" at 2608.5,5250 h40
  text "rvcc?" at 2070,4980 h40 r180

## Dimensions
2050,3420 to 2050,5620 on Mechanical 1
2050,3420 to 4600,3420 on Mechanical 1

## Text inside footprints (layer, text, board x,y; h text height)
J1: Mechanical 1 "PCB Edge" at 2032.98,4461.09 h9.84 r270
P10: Top Overlay "2" at 2150,3880 h40; Top Overlay "1" at 2150,3780 h40; Top Overlay "14" at 2950,3880 h40; Top Overlay "13" at 2950,3780 h40